# Altium PCB Buck Convertor V2 PCB.PcbDoc
Units mil, origin at the board's own origin, x right, y up, seen from the top; angles counter-clockwise.
Board outline 2220 x 990 mil, 2 copper layers (Top Layer, Bottom Layer); 18 components, 11 nets, 42 pads, 0 vias.
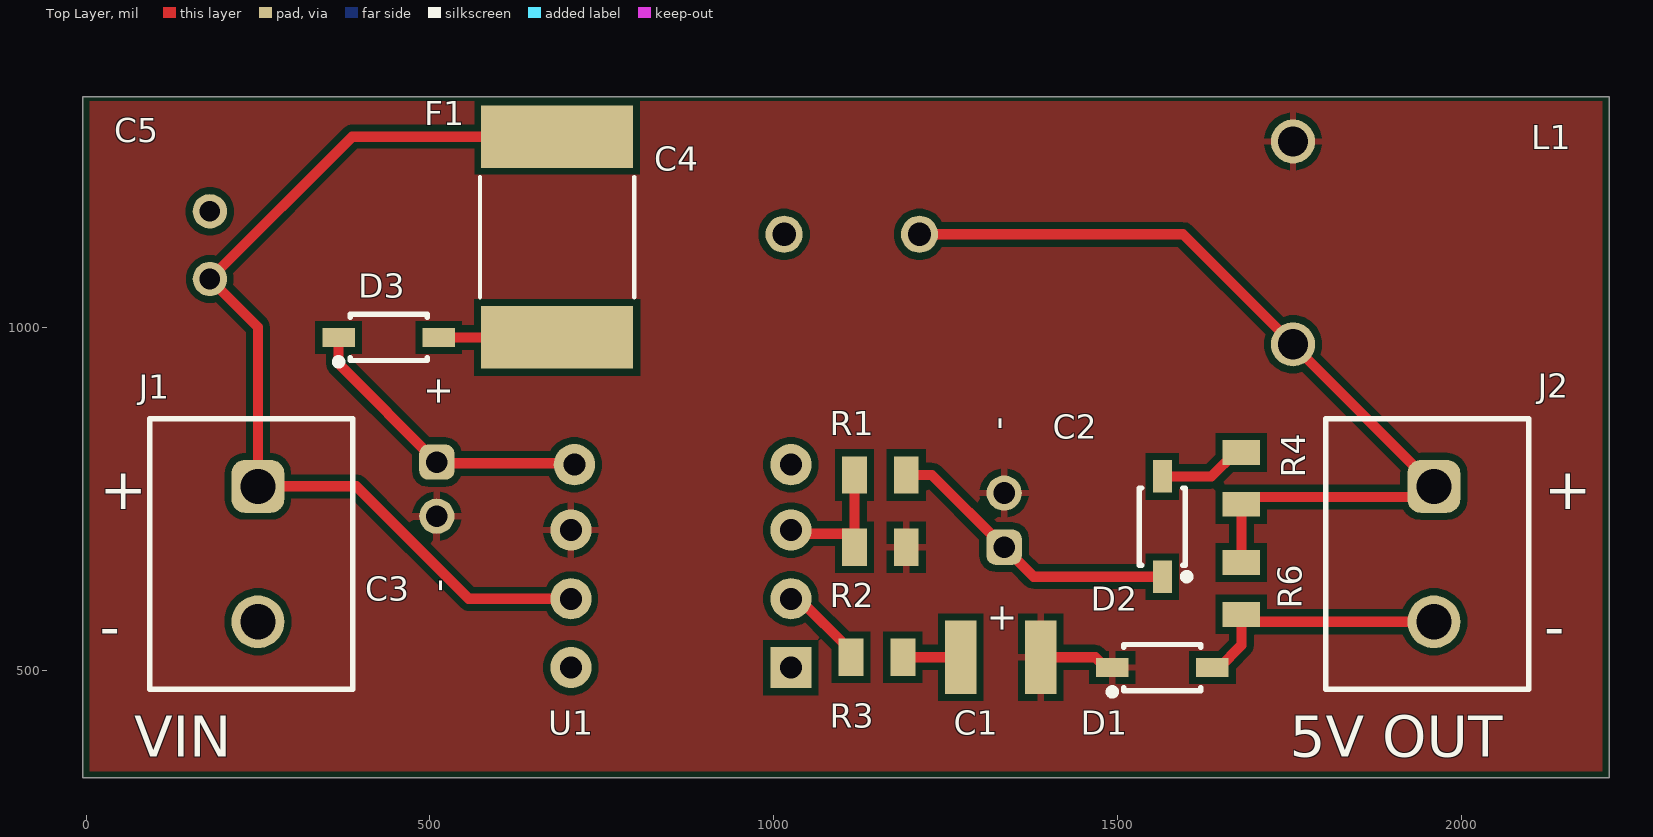
[diagram p0: Top Layer view]
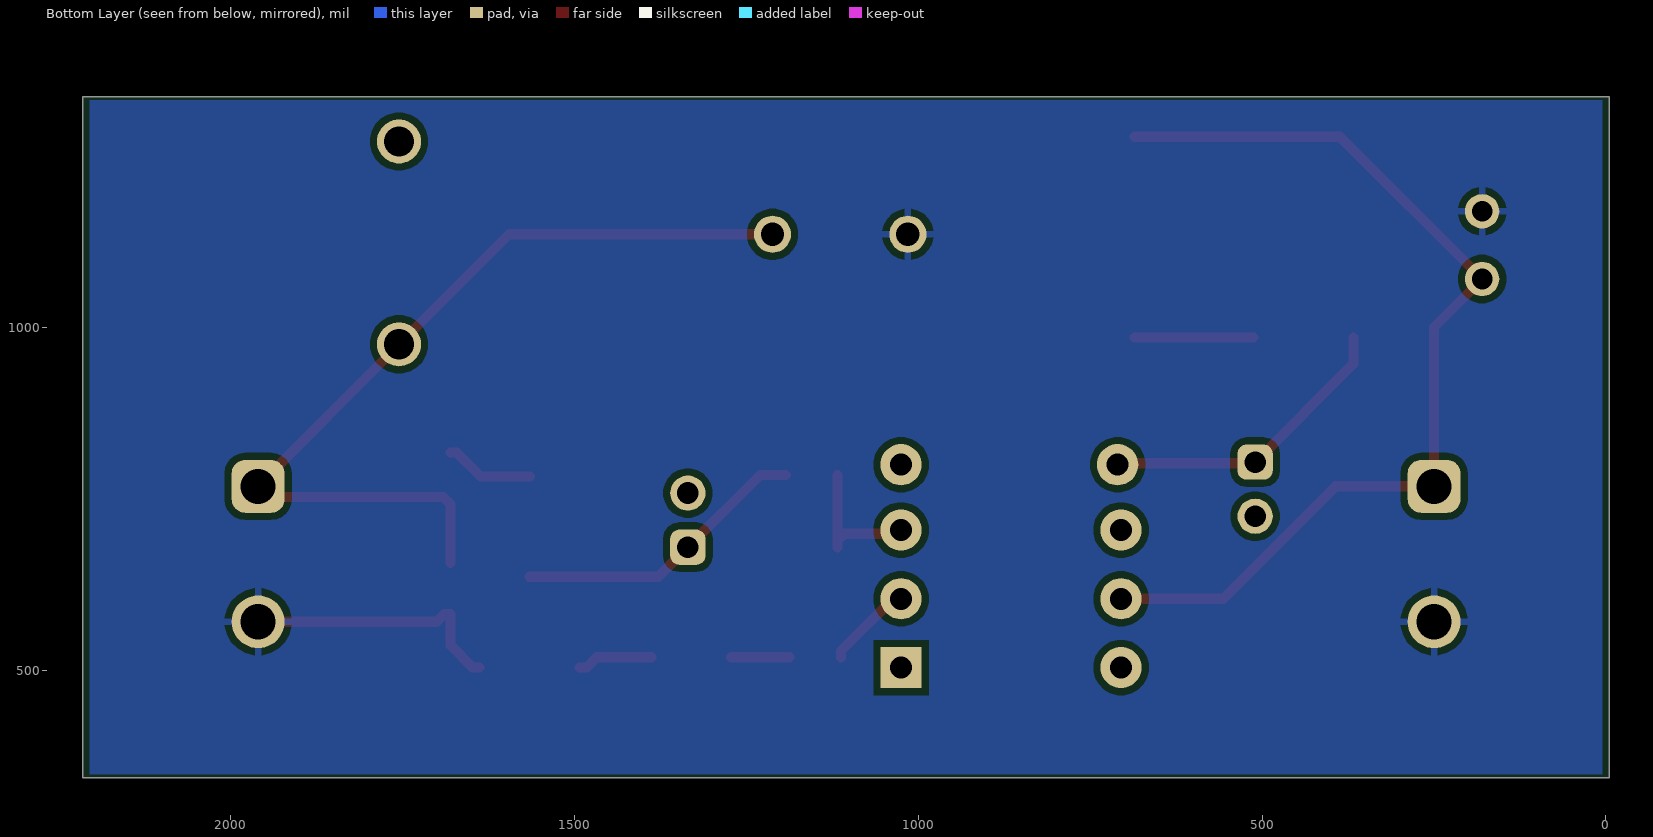
[diagram p1: Bottom Layer view, seen from below]
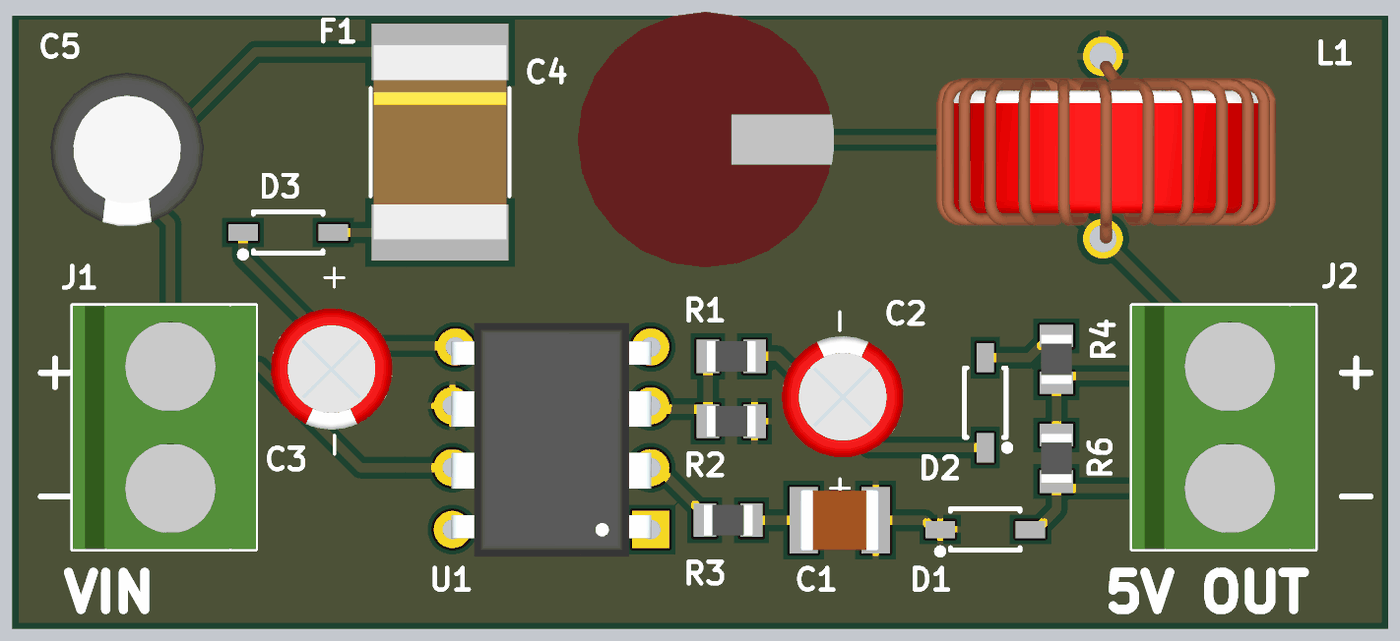
[diagram p2: 3D render of the assembled board from above, using the file's embedded part models]

## Layer stack, top to bottom
Top Solder: solder mask 0.4, Solder Resist, Dk 3.5
Top Layer: signal copper 1.4
Dielectric 1: dielectric 12.6, FR-4, Dk 4.8
Bottom Layer: signal copper 1.4
Bottom Solder: solder mask 0.4, Solder Resist, Dk 3.5

## Board outline
-5,345 2215,345 2215,1335 -5,1335

## Design rules (kind name [scope] priority, off if disabled: settings)
Clearance [All] p1: gap=10 ignorepadtopadclearanceinfootprint=FALSE
PolygonConnect [All] p1: connectstyle=Relief reliefconductorwidth=10 reliefentries=4 polygonreliefangle="90 Angle" airgapwidth=10
RoutingVias [All] p1: holewidth=28 width=50 viastyle="Through Hole" minholewidth=28 minwidth=50 maxholewidth=28 maxwidth=50
SolderMaskExpansion [All] p1: expansion=4 istentingtop=FALSE
SupplyNets "Schematic Supply Nets" [InNet('GND')] p1: voltage=0.000
SupplyNets "Schematic Supply Nets_5" [InNet('VIN')] p2: voltage=0.000
SupplyNets "Schematic Supply Nets_4" [InNet('Vc')] p3: voltage=0.000
SupplyNets "Schematic Supply Nets_3" [InNet('IC GND')] p4: voltage=0.000
SupplyNets "Schematic Supply Nets_2" [InNet('+5V')] p5: voltage=0.000
UnRoutedNet [All] p1: checkbadconnections=TRUE
Width [All] p1: maxlimit=15 minlimit=10 preferedwidth=10 minimp=50.000000 maximp=50.000000 favimp=50.000000
29 further rules are at their usual default settings.

## Components (designator, comment, footprint, x,y, rotation, side; value= is the part's Value field where it differs from the comment)
C1 "CL10B105KA8NNNC" C1210C105K5RACTU 1330,520 r0 top value=1uF
C2 "860020672005" "RADIAL, CAN" 1335,719.37 r270 top value=1uF
C3 "860020672006" "RADIAL, CAN" 510,764.37 r90 top value=2.2uF
C4 "16ZLH1000MEFC10X16" 25PX1000MEFCT810X16 1115,1135 r0 top value=1000uF
C5 "35ZLH100MEFC6.3X11" 35ZLH100MEFC6.3X11 180,1118.43 r270 top value=100uF
D1 "BAT46W-7-F" DIOD-SOD-123-2_V 1565,505 r180 top
D2 "BAT46W-7-F" DIOD-SOD-123-2_V 1565,710 r270 top
D3 "BAT46W-7-F" DIOD-SOD-123-2_V 440,985 r180 top
F1 "0ZCF0185FF2C" "2920 (7351 METRIC), CONCAVE" 685,1131 r270 top
J1 "691137710002" 691137710002 240,670 r270 top
J2 "691137710002" 691137710002 1950,670 r270 top
L1 "CTX50-1-52-R" CTX50-1-52-R 1760,1115 r270 top value=50uH
R1 "RMCF0805FT3K74" 0805 1155,785 r0 top
R2 "RC0805FR-071K24L" RC0805FR-071K24L 1155,680 r0 top value=1.24K
R3 "RMCF0805FT470R" 0805 1150,520 r180 top
R4 "RMCF0805JT10R0" 0805 1680,780 r90 top
R6 "LTR10EZPJ470" 0805 1680,620 r90 top
U1 "LT1172CN8#PBF" LT1172CN8#PBF-ND 870,645 r180 top

## Footprints (in the part's own frame and the unit in brackets; to place one, negate y for a bottom-side part, rotate by r counter-clockwise, add the part's x,y. Pads: shape width x height; smd on the part's side, far side on the other; paste and mask are expansions set on the pad)
25PX1000MEFCT810X16 [mil]
  round 54 / inner round 60 / far side round 54 hole 34 paste-99999 mask+0: 1(-100,0) 2(96.85,0)
  body extent -208,-206 206,206, height 690
35ZLH100MEFC6.3X11 [mil]
  round 50 / inner round 60 / far side round 50 hole 30 paste-99999 mask+0: 1(-50,0) 2(48.43,0)
  body extent -125,-124 123,124, height 492
0805 [mm] "0805 footprint"
  rect 0.92x1.38 smd: 1(-0.955,0) 2(0.955,0)
  body extent -1,-0.63 1,0.63, height 0.6
"2920 (7351 METRIC), CONCAVE" [mil]
  rect 91x221 smd paste+0 mask+0: 1(-146,0) 2(146,0)
  silkscreen extent -87,-112 87,112, body extent -157,-107 157,107, height 45
691137710002 [mm]
  rrect50% 1.95x1.95 hole 1.3: 1(-2.5,0.25)
  round 1.95 hole 1.3: 2(2.5,0.25)
  silkscreen extent -5,-3.75 5,3.75, body extent -5,-3.75 5,3.75, height 11.6
C1210C105K5RACTU [mm]
  rect 1.16x2.72 smd: 1(-1.475,0) 2(1.475,0)
  body extent -1.6,-1.25 1.6,1.25, height 1.45
CTX50-1-52-R [mil]
  round 64 / inner round 60 / far side round 64 hole 44 paste-99999 mask+0: 1(-155,-5) 2(140,-5)
  body extent -148,-274 148,274, height 524
DIOD-SOD-123-2_V [mm]
  rect 1.2x0.7 smd: 1(-1.85,0) 2(1.85,0)
  silkscreen extent -1.43,-0.85 1.97,1.02, body extent -1.42,-0.85 1.43,0.85, height 1.45
LT1172CN8#PBF-ND [mil]
  rect 60x60 / inner round 60 / far side rect 60x60 hole 32: 1(-155,140)
  round 60 hole 32: 2(-155,40) 3(-155,-60) 4(-155,-155) 5(160,-155) 6(165,-60) 7(165,40) 8(165,140)
  body extent -156,-194 166,184, height 200
"RADIAL, CAN" [mm] "Lead Spacing / 0.079\" (2.00mm)"
  rrect50% 1.3x1.3 hole 0.8: 1(1,0)
  round 1.3 hole 0.8: 2(-1,0)
  body extent -2.49,-2.5 2.5,2.5, height 10.89
RC0805FR-071K24L [mm]
  rect 0.92x1.38 smd: 1(-0.955,0) 2(0.955,0)
  body extent -1,-0.63 1,0.63, height 0.6

## Part data
C1: "Ceramic Capacitor 1uF", Capacitor Type=Aluminium, Manufacturer=KEMET, Manufacturer Part Number=ESL105M100AC3AA, Supplier Part Number=399-15737-ND, ComponentLink1Description=https://datasheet.ciiva.com:443/pdfs/VipMasterIC/IC/KEME/KEME-S-A0008958449/KEME-S-A0008958449-1.pdf?src-supplier=IHS+Markit, ComponentLink1URL=https://datasheet.ciiva.com:443/pdfs/VipMasterIC/IC/KEME/KEME-S-A0008958449/KEME-S-A0008958449-1.pdf?src-supplier=IHS+Markit, ComponentLink2Description=https://api.kemet.com/component-edge/download/datasheet/ESL105M100AC3AA.pdf?src-supplier=Digikey, ComponentLink2URL=https://api.kemet.com/component-edge/download/datasheet/ESL105M100AC3AA.pdf?src-supplier=Digikey, ComponentLink3Description=https://datasheet.octopart.com/ESL105M100AC3AA-KEMET-datasheet-176335207.pdf?src-supplier=Newark, ComponentLink3URL=https://datasheet.octopart.com/ESL105M100AC3AA-KEMET-datasheet-176335207.pdf?src-supplier=Newark, Pins=2, Pricing="1=0.15, 10=0.095, 50=0.0708, 100=0.0633, 500=0.04972, 1000=0.04522, 2500=0.04024, 5000=0.03706 (USD)", Reach SVHC Compliant=Yes, RoHS=Yes, RoHS Compliant=Yes, Stock=14632, Supplier=Digikey, Supplier 1=Avnet, Supplier Part Number 1=CL10B105KA8NNNC
C2: "1 µF 50 V Aluminum Electrolytic Capacitors Radial, Can 2000 Hrs @ 105°C", Supplier Part Number 1=732-8851-1-ND, Supplier 1=Digikey
C3: "2.2 µF 50 V Aluminum Electrolytic Capacitors Radial, Can 2000 Hrs @ 105°C", Supplier Part Number 1=732-8852-1-ND, Supplier 1=Digikey
C4: "Aluminum Electrolytic Capacitor, Polarized, Aluminum (wet), 16V, 20% +Tol, 20% -Tol, 1000uF, Through Hole Mount", Capacitor Type=Aluminium, Leakage Current=160uA, Manufacturer=Rubycon, Manufacturer Series=ZLH, Max Operating Temperature=105°C, Min Operating Temperature=-40°C, Package Shape=Cylindrical, Package Style=RadialMeter, Rated DC Voltage (URdc)=16V, Ripple Current=1.056A, Supplier Part Number=1189-1147-ND, Tolerance  (fill in as +-)=20%, Category="Aluminum Electrolytic Capacitors", ComponentLink1Description=https://datasheet.ciiva.com:443/pdfs/VipMasterIC/IC/RUBY/RUBYS01453/RUBYS01453-1.pdf?src-supplier=IHS+Markit, ComponentLink1URL=https://datasheet.ciiva.com:443/pdfs/VipMasterIC/IC/RUBY/RUBYS01453/RUBYS01453-1.pdf?src-supplier=IHS+Markit, ComponentLink2Description=https://datasheet.ciiva.com/6300/e-zlh-6300460.pdf?src-supplier=Digikey, ComponentLink2URL=https://datasheet.ciiva.com/6300/e-zlh-6300460.pdf?src-supplier=Digikey, ComponentLink3Description=https://datasheet.ciiva.com/11692/e-zlh-11692166.pdf?src-supplier=Avnet, ComponentLink3URL=https://datasheet.ciiva.com/11692/e-zlh-11692166.pdf?src-supplier=Avnet, ComponentLink4Description=https://datasheet.ciiva.com/16313/e-zlh-16313390.pdf?src-supplier=Future+Electronics, ComponentLink4URL=https://datasheet.ciiva.com/16313/e-zlh-16313390.pdf?src-supplier=Future+Electronics, ComponentLink5Description=https://datasheet.ciiva.com/22732/1910927-22732477.pdf?src-supplier=Element14, ComponentLink5URL=https://datasheet.ciiva.com/22732/1910927-22732477.pdf?src-supplier=Element14, Diameter=10mm, Dielectric Material=Aluminium, Length=16mm, Manufacturer Part Number=16ZLH1000MEFC10X16, Mounting Technology="Through Hole", Packaging=Bulk, Pins=2, Polarity=Polarized, Pricing="1=0.61, 10=0.377, 50=0.2812, 100=0.2505, 500=0.19778, 1000=0.18113, 3000=0.16029, 5000=0.1525 (USD)", Reach SVHC Compliant=Yes, RoHS=Yes, RoHS Compliant=Yes, Stock=32532, Supplier=Digikey, Tan Delta=0.16, Terminal Pitch=5mm, Termination=Wire, Tolerance (fill in as +-)=20%
C5: library part a00bbbee19879c290e62620ae7e47b1, "CAP ALUM 100UF 20% 35V RADIAL", Capacitance=100uF, Case/Package=Radial, Dielectric Material=Aluminium, Leakage Current=3uA, Max Operating Temperature=105°C, Min Operating Temperature=-40°C, Package Quantity=2000, Ripple Current=540mA, Tolerance=20%, Voltage=35V, Construction=RADIAL, Diameter=6.3mm, Height=11mm, Height - Seated (Max)=0.492inch, Impedance=94mR, Lead Diameter=0.5mm, Lead Pitch=2.5mm, Life (Hours)=6000Hour, Mount="Through Hole", Number of Pins=2, Packaging=Bulk, Radiation Hardening=No, REACH SVHC="No SVHC", Ripple Current (AC)=540mA, RoHS Compliant=Yes, Series=ZLH, Termination=Radial, Voltage Rating=35V, Voltage Rating (DC)=35V
D1 D2 D3: library part CMP-0303-00004-1, "Surface Mount Schottky Barrier Diode, 100 V, -55 to 125 degC, 2-Pin SOD123, RoHS, Tape and Reel", Manufacturer="Diodes Inc", Operating Temperature="-55 to 125 degC", ComponentLink1Description="Manufacturer URL", ComponentLink1URL=http://www.diodes.com/, ComponentLink2Description=Datasheet, ComponentLink2URL=http://diodes.com/datasheets/ds30044.pdf, ComponentLink3Description="Package Specification", ComponentLink3URL=http://diodes.com/datasheets/ds30044.pdf, CT@1 V="12 pF Typ.", DatasheetVersion="Rev. 16-2", IR@1.5 V="0.3 uA Max.", Mounting Technology="Surface Mount", PackageDescription="2-Pin SMD, Body 2.7 x 1.55 mm, Height 1.45 mm", Packing="Tape and Reel", PartNumber=BAT46W-7-F, RoHS=TRUE, V(BR)R="100 V Min.", VF@10 mA="0.45 V Max."
F1: "Polymeric PTC Resettable Fuse 33V 1.85 A Ih Surface Mount 2920 (7351 Metric), Concave", Supplier Part Number 1=5923-0ZCF0185FF2CCT-ND, Supplier 1=Digikey
J1 J2: library part CMP-1502-03324-2, Current Rating=16A, Max Operating Temperature=120°C, Min Operating Temperature=-30°C, Voltage Rating=300V, Contact Material="Nickel, Tin", Height=11.6mm, Lead Pitch=5mm, NexarPartId=78871135, Number of Contacts=2, Number of Pins=2, Number of Rows=1, Packaging=Box, RoHS=Non-Compliant
L1: "General Purpose Inductor, 50uH, 1 Element, Iron-Core", DC Resistance (DCR)=71.5mR, Inductance-Nom (L)=50uH, Inductor Application="POWER INDUCTOR", Inductor Type="GENERAL PURPOSE INDUCTOR", Manufacturer="Eaton Cooper", Max Current Rating=2.6A, Max Operating Temperature=75°C, Min Operating Temperature=-40°C, Package Diameter=16.2mm, Package Length=9mm, Package Style=ToroidalMeter, Supplier Part Number=513-1108-ND, Category="Fixed Inductors", Channels=1, ComponentLink1Description=https://datasheet.ciiva.com:443/pdfs/VipMasterIC/IC/ETON/ETON-S-A0008259577/ETON-S-A0008259577-1.pdf?src-supplier=IHS+Markit, ComponentLink1URL=https://datasheet.ciiva.com:443/pdfs/VipMasterIC/IC/ETON/ETON-S-A0008259577/ETON-S-A0008259577-1.pdf?src-supplier=IHS+Markit, ComponentLink2Description=https://datasheet.ciiva.com/8005/705007-8005134.pdf?src-supplier=Element14, ComponentLink2URL=https://datasheet.ciiva.com/8005/705007-8005134.pdf?src-supplier=Element14, ComponentLink3Description=https://datasheet.ciiva.com/16430/bus-elx-ds-pm4304-lpci-series-16430805.pdf?src-supplier=Future+Electronics, ComponentLink3URL=https://datasheet.ciiva.com/16430/bus-elx-ds-pm4304-lpci-series-16430805.pdf?src-supplier=Future+Electronics, ComponentLink4Description=https://datasheet.ciiva.com/30168/4935b080188143dbb73de2176f2c5e73-30168168.pdf?src-supplier=Onlinecomponents.com, ComponentLink4URL=https://datasheet.ciiva.com/30168/4935b080188143dbb73de2176f2c5e73-30168168.pdf?src-supplier=Onlinecomponents.com, Construction="Vertical Mount", Core Material=Ferrite, Lead Diameter=0.58mm, Lead Length=10mm, Lead Pitch=7.5mm, Manufacturer Part Number=CTX50-1-52-R, Packaging=Bulk, Pins=2, Pricing="1=2.67, 10=2.196, 25=2.0312, 50=1.915, 100=1.8057, 300=1.6451, 600=1.55137, 1200=1.46311, 2700=1.36639 (USD)", Reach SVHC Compliant=Yes, RoHS=Yes, RoHS Compliant=Yes, Shape/Size Description="CYLINDRICAL PACKAGE", Shielding=Unshielded, Stock=1049, Supplier=Digikey, Surface Mount=No, Terminal Placement=Radial, Termination=Wire
R1: "3.74 kOhms ±1% 0.125W, 1/8W Chip Resistor 0805 (2012 Metric) Automotive AEC-Q200 Thick Film", Resistance=3.74K, Supplier Part Number 1=RMCF0805FT3K74CT-ND, Supplier 1=Digikey
R2: "Fixed Resistor, Metal Film, 0.25W, 1240ohm, 250V, 1% +/-Tol, -100,100ppm/Cel", Manufacturer=Yageo, Manufacturer Part Number=MFR-25FBF52-1K24, Supplier Part Number=1.24KXBK-ND, Supplier Part Number 1=311-1.24KCRCT-ND, Category="Through-Hole Resistors", ComponentLink1Description=https://datasheet.ciiva.com:443/pdfs/VipMasterIC/IC/YAGO/YAGO-S-A0009358480/YAGO-S-A0009358480-1.pdf?src-supplier=IHS+Markit, ComponentLink1URL=https://datasheet.ciiva.com:443/pdfs/VipMasterIC/IC/YAGO/YAGO-S-A0009358480/YAGO-S-A0009358480-1.pdf?src-supplier=IHS+Markit, ComponentLink2Description=https://datasheet.ciiva.com/25646/yageolr-mfr-2013-25646123.pdf?src-supplier=Digikey, ComponentLink2URL=https://datasheet.ciiva.com/25646/yageolr-mfr-2013-25646123.pdf?src-supplier=Digikey, Pricing="1=0.1, 10=0.039, 25=0.0328, 50=0.0286, 100=0.0251, 250=0.02128, 500=0.0189, 1000=0.01685, 5000=0.01321 (USD)", RoHS=Yes, Stock=9531, Supplier=Digikey, Supplier 1=Digikey
R3: "470 Ohms ±1% 0.125W, 1/8W Chip Resistor 0805 (2012 Metric) Automotive AEC-Q200 Thick Film", Resistance=470R, Supplier Part Number 1=RMCF0805FT470RCT-ND, Supplier 1=Digikey
R4: "10 Ohms ±5% 0.125W, 1/8W Chip Resistor 0805 (2012 Metric) Automotive AEC-Q200 Thick Film", Resistance=10R, Supplier Part Number 1=RMCF0805JT10R0CT-ND, Supplier 1=Digikey
R6: "47 Ohms ±5% 1W Chip Resistor Wide 0805 (2012 Metric), 0508 Automotive AEC-Q200, Pulse Withstanding Thick Film", Resistance=47R, Supplier Part Number 1=RHM47BUCT-ND, Supplier 1=Digikey
U1: library part LT-LT1172-X8-8, "100 kHz, 1.25 A, High Efficiency Switching Regulator, 8-pin DIP (N8-8), 0 to 100 degC, Pb-Free", Frequency Sync Range="120kHz - 160kHz", Manufacturer="Linear Technology", ComponentLink1Description="Manufacturer URL", ComponentLink1URL=http://www.linear.com/, ComponentLink2Description=Datasheet, ComponentLink2URL=http://cds.linear.com/docs/en/datasheet/117012fg.pdf, ComponentLink3Description="Package Specification", ComponentLink3URL=http://www.linear.com/docs/en/packaging/05081510_I_N8.pdf, DatasheetVersion="Rev. G", Mounting Technology="Through Hole", Number of Outputs=1, PackageDescription="8-Pin PDIP, Body 10.16 x 6.48 mm, Pitch 2.54 mm", PackageReference=N8-8, PackageVersion="Rev. I, 07/2011", PartNumber=LT1172CN8#PBF, RoHS=TRUE

## Nets (pads, with @x,y where several pads share a name; then routed paths per layer and width w, separated by ;. In a path a pad name is that pad's centre, name@x,y a point inside that pad or via, vN(x,y) a via of type N, cw(c..) or ccw(c..) an arc to the next point about the centre after c; other vN are vias at no path point)
+5V: C4.2 J2.1 L1.2 R4.1 R6.2 | length 1276.3
  Top Layer w15: C4.2 1595,1135 L1.2 1755,974.13 1959.84,769.29 J2.1 1944.43,753.01 1690.61,753.01 R4.1 R6.2
FB: R1.1 R2.1 U1.3 | length 204
  Top Layer w15: U1.3 1030.33,699.67 1106.79,699.67 R2.1@1117.4,689.06 ; R2.1 R2.1@1117.4,689.06 ; R1.1 R2.1@1117.4,689.06
GND: C4.1 C5.1 D1.1 J1.2 J2.2 R6.1 | length 385
  Top Layer w15: D1.1 1647.68,505 1680,537.32 R6.1 1689.06,582.4 1699.88,571.57 J2.2
"IC GND": C1.2 C2.2 C3.2 D1.2 L1.1 R2.2 U1.6 | length 110.3
  Top Layer w15: C1.2 1467.32,520 1482.32,505 D1.2
NetC1_1: C1.1 R3.1 | length 84.3
  Top Layer w15: R3.1 C1.1
NetC2_1: C2.1 D2.2 R1.2 | length 433.6
  Top Layer w15: R1.2 1230,785 C2.1 1377.83,637.17 D2.2
NetC3_1: C3.1 D3.2 U1.5 | length 442
  Top Layer w15: D3.2 367.17,946.57 C3.1 511.87,801.87 708.13,801.87 U1.5
NetD2_1: D2.1 R4.2 | length 129.4
  Top Layer w15: D2.1 1636.18,782.83 1670.94,817.6 R4.2
NetD3_1: D3.1 F1.2 | length 172.2
  Top Layer w15: D3.1 F1.2
Vc: R3.2 U1.2 | length 127.9
  Top Layer w15: U1.2 1036.46,605 1112.4,529.06 R3.2
VIN: C5.2 F1.1 J1.1 U1.7 | length 1444.1
  Top Layer w15: F1.1 387,1277 C5.2 249.84,1000.16 J1.1 393.08,768.43 556.51,605 U1.7
pads on no net: U1.1 U1.4 U1.8

## Polygon pours and split planes (outlines as drawn)
"IC GND" on Top Layer "IC_GND_L01_P000" (solid, pour order 0): 5,1328.69 2205,1328.69 2205,354.32 5,354.32
GND on Bottom Layer "GND_L02_P001" (solid, pour order 1): 2205,1330 5,1330 5,350 2205,350

## Silkscreen, mask and mechanical layers (free items; w line width, h text height)
Top Overlay:
  text "+" at 20,735 h60
  text "+" at 2120,735 h60
  text "-" at 20,535.01 h60
  text "-" at 2120,535.01 h60
  text "VIN" at 70,375 h60
  text "5V OUT" at 1750,375 h60
Mechanical 1:
  the board outline again, w19.68

## Text inside footprints (layer, text, board x,y; h text height)
C2: Top Overlay "+" at 1315.31,599.29 h39.37 r270; Top Overlay "-" at 1315,869.37 h39.37 r270
C3: Top Overlay "+" at 529.68,884.45 h39.37 r90; Top Overlay "-" at 530,614.37 h39.37 r90